# EAGLE board hkr3000 (EAGLE 6.4)
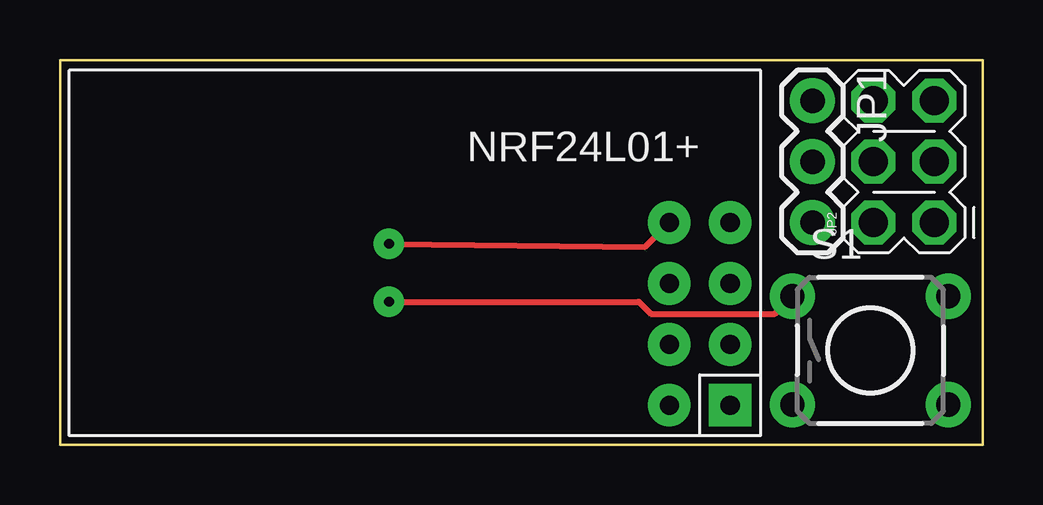
[diagram p0: board, top side]
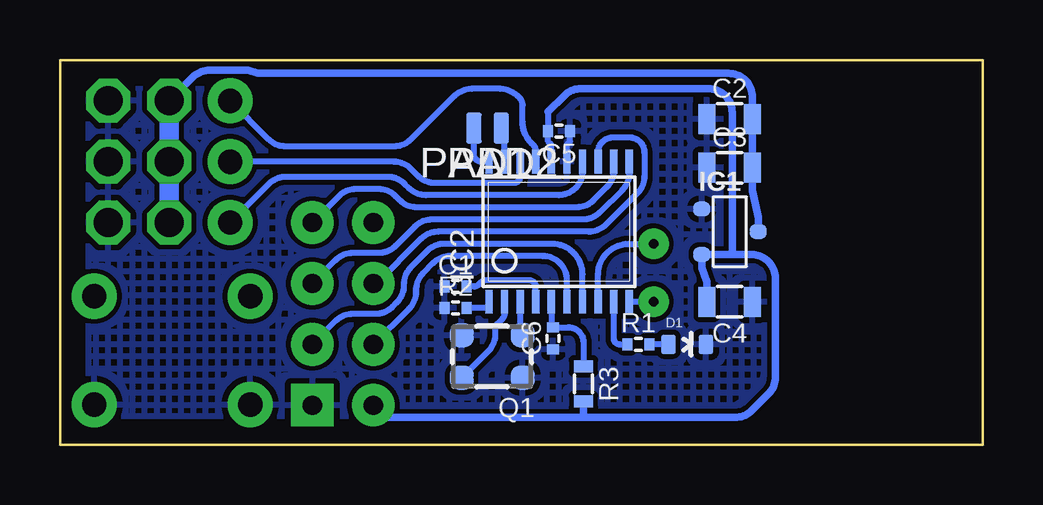
[diagram p1: board, bottom side, seen from below]

Size 38.46 x 16.05 mm. Coordinates in mm from the lower left corner, seen from the top.
Outline: 0,0 38.46,0 38.46,16.05 0,16.05 0,0
Copper layers (1*16): Top 0.035mm / dielectric 1.5mm / Bottom 0.035mm
Design rules "default": minimum track width 10mil, minimum drill 24mil, track to track 8mil, track to pad 8mil, pad to pad 8mil, via to via 8mil, smd to smd 8mil, copper to edge 40mil, drill to drill 8mil, minimum pad ring 10mil, minimum via ring 8mil, stop-mask expansion 4mil, vias tented up to drill 0mil, thermal gap 10mil

## Footprints (pad centres in the part's own frame; a part is rotated, then mirrored left to right if it is on the bottom)
0402 = smd 0.42 x 0.5: P$1 -0.46,0; P$2 0.46,0
0805 = smd 0.7 x 1.25: P$1 -0.95,0; P$2 0.95,0
LED-0603 = smd 0.8 x 0.6: A 0,-0.777; C 0,0.777
XC6206_SOT-23 = smd 0.6 x 0.7: 1 -0.95,-1.161; 2 0.95,-1.161; 3 0,1.186
TSSOP-20 = smd 0.305 x 0.991: 1 -2.925,-2.918; 2 -2.275,-2.918; 3 -1.625,-2.918; 4 -0.975,-2.918; 5 -0.325,-2.918; 6 0.325,-2.918; 7 0.975,-2.918; 8 1.625,-2.918; 9 2.275,-2.918; 10 2.925,-2.918; 11 2.925,2.918; 12 2.275,2.918; 13 1.625,2.918; 14 0.975,2.918; 15 0.325,2.918; 16 -0.325,2.918; 17 -0.975,2.918; 18 -1.625,2.918; 19 -2.275,2.918; 20 -2.925,2.918
1X03 = drill 1.016 pad 1.88: 1 0,0; 2 2.54,0; 3 5.08,0
2X3_POGO = drill 1.2 pad 1.829 octagon: P$1 0,0; P$2 0,2.54; P$3 2.54,0; P$4 2.54,2.54; P$5 5.08,0; P$6 5.08,2.54
SMD1,27-2,54 = smd 1.27 x 0.635: 1 0,0
FA-20H = smd 1 x 1: 1 -1.27,-0.889; 2 1.27,-0.889; 3 1.27,0.889; 4 -1.27,0.889
0603 = smd 0.5 x 0.8: P$1 -0.735,0; P$2 0.735,0
TACTILE-PTH = drill 1.016 pad 1.88: 1 -3.251,2.261; 2 3.251,2.261; 3 -3.251,-2.261; 4 3.251,-2.261
NRF24L01 = drill 0.8 pad 1.778: 3.3V 0,2.54; CE 2.54,0; CSN 2.54,2.54; IRQ 7.62,2.54; MISO 7.62,0; MOSI 5.08,2.54; SCK 5.08,0 | drill 0.8 pad 1.778 square: GND 0,0

## Placement (x,y rotation side)
C1  47n  [0402]  21.97,6.6 0 bottom
C2  4.7u  [0805]  10.54,13.59 0 bottom
C3  4.7u  [0805]  10.54,11.56 0 bottom
C4  4.7u  [0805]  10.54,5.97 180 bottom
C5  0.1u  [0402]  17.65,13.08 180 bottom
C6  0.1u  [0402]  17.91,4.44 90 bottom
D1  RED  [LED-0603]  12.32,4.19 270 bottom
IC1  XC6206-3.3  [XC6206_SOT-23]  10.54,8.89 270 bottom
IC2  STM32F030F4P6  [TSSOP-20]  17.65,8.89 0 bottom
JP1  [1X03]  31.37,14.35 270 top
JP2  [2X3_POGO]  36.45,9.27 90 top
PAD1  [SMD1,27-2,54]  21.21,13.21 90 bottom
PAD2  [SMD1,27-2,54]  20.07,13.21 90 bottom
Q1  16 MHz  [FA-20H]  20.45,3.68 180 bottom
R1  680  [0402]  14.35,4.19 0 bottom
R2  1k  [0402]  21.97,5.71 0 bottom
R3  0r  [0603]  16.64,2.54 270 bottom
S1  Bind  [TACTILE-PTH]  33.78,3.94 0 top
U$1  NRF24L01  [NRF24L01]  27.94,1.65 90 top

## Library data of the parts
C1-C6 R1-R3 = RC.v2
D1 = led; PROD_ID: DIO-00819
IC1 = XC6206
IC2 = stm32f030x
JP1 = SparkFun-Connectors
JP2 = SparkFun-Connectors; PROD_ID: HW-11044
PAD1 PAD2 = pad
Q1 = resonator
S1 = SparkFun-Electromechanical
U$1 = eBay parts

## Nets
3V3: C4.P$2 C5.P$2 IC1.2 IC2.16 R3.P$2 U$1.3.3V
3V3-1: C6.P$2 IC2.5 R3.P$1
GND: C1.P$1 C2.P$1 C3.P$1 C4.P$1 C5.P$1 C6.P$1 D1.C IC1.1 IC2.15 JP2.P$1 JP2.P$3 JP2.P$5 Q1.2 Q1.4 R2.P$1 S1.3 S1.4 U$1.GND
N$1: C2.P$2 C3.P$2 IC1.3 JP2.P$2 JP2.P$4 JP2.P$6
N$2: D1.A R1.P$2
N$3: IC2.20 PAD1.1
N$4: IC2.11 U$1.SCK
N$5: IC2.12 U$1.MISO
N$6: IC2.13 U$1.MOSI
N$7: IC2.17 JP1.1
N$8: IC2.18 JP1.2
N$9: IC2.14 JP1.3
N$10: IC2.2 Q1.3
N$11: IC2.3 Q1.1
N$12: C1.P$2 IC2.4
N$13: IC2.1 R2.P$2
N$14: IC2.9 R1.P$1
N$15: IC2.19 PAD2.1
N$16: IC2.7 U$1.CE
N$17: IC2.6 U$1.CSN
N$18: IC2.8 U$1.IRQ
N$19: IC2.10 S1.1

## Tracks (layer width: path | path; a pad name or v marks a point on that pad's centre or on a via)
3V3
  Bottom 0.254: IC2.16 17.98,12.52 18.11,12.65 C5.P$2 18.11,13.89
  Bottom 0.305: 18.11,13.89 17.44,14.57 arc45 16.73,14.86 11.44,14.86 arc90 10.44,13.86 10.44,7.94 | C4.P$2 11.49,6.79 11.7,7.38 IC1.2 10.44,7.94 | U$1.3.3V 24.89,1.14 16.64,1.14 | 16.64,1.14 10.32,1.14 arc-45 9.61,1.44 8.93,2.12 arc-45 8.64,2.83 8.64,6.94 arc-90 9.64,7.94 10.44,7.94 | R3.P$2 16.64,1.14
3V3-1
  Bottom 0.254: IC2.5 17.98,4.98 C6.P$2 17.27,4.9 arc90 16.64,4.27 R3.P$1
GND
  Bottom 0.254: IC2.15 17.33,12.52 17.19,12.65 C5.P$1
  pour Bottom (hatched): 8.89,15.88 37.97,15.88 37.97,0.13 8.89,0.13
N$1
  Bottom 0.305: IC1.3 9.36,9.48 9.59,10.61 C3.P$2 C2.P$2 9.59,14.49 arc-90 10.59,15.49 30.23,15.49 30.61,15.62 32.22,15.62 arc-45 32.93,15.33 JP2.P$6
  Bottom 0.813: JP2.P$2 JP2.P$4 JP2.P$6
N$2
  Bottom 0.254: D1.A R1.P$2
N$3
  Bottom 0.254: IC2.20 20.89,11.81 arc90 21.21,12.12 PAD1.1
N$4
  Bottom 0.254: IC2.11 14.73,11.34 arc45 15.02,10.63 15.96,9.69 arc45 16.67,9.4 22.95,9.4 arc-45 23.66,9.11 24.47,8.29 arc45 25.18,8 26.26,8 arc-45 26.96,7.71 U$1.SCK
N$5
  Bottom 0.254: IC2.12 15.38,11.45 arc45 15.67,10.75 16.22,10.2 arc45 16.92,9.91 23.59,9.91 arc45 24.3,10.2 24.47,10.38 arc-45 25.18,10.67 26.13,10.67 arc-45 26.84,10.38 U$1.MISO
N$6
  Bottom 0.254: IC2.13 16.03,12.19 arc90 15.39,12.83 14.73,12.83 arc90 14.1,12.19 14.1,11.21 arc45 14.39,10.5 15.71,9.18 arc45 16.42,8.89 22.7,8.89 arc-45 23.41,8.6 25.27,6.73 U$1.MOSI
N$7
  Bottom 0.254: IC2.17 18.63,12.27 arc-45 18.72,12.5 18.8,12.58 arc45 19.18,13.48 19.18,14.16 arc-45 19.31,14.49 arc-45 20.21,14.86 21.19,14.86 arc-45 22.09,14.49 23.84,12.74 arc45 24.54,12.45 29.05,12.45 arc45 29.76,12.74 JP1.1
N$8
  Bottom 0.254: IC2.18 19.28,11.18 arc90 19.53,10.92 22.83,10.92 arc45 23.53,11.21 23.84,11.52 arc-45 24.54,11.81 JP1.2
N$9
  Bottom 0.254: IC2.14 16.68,11.41 arc90 17.68,10.41 23.21,10.41 arc45 23.91,10.71 24.09,10.88 arc-45 24.8,11.18 29.05,11.18 arc-45 29.76,10.88 JP1.3
N$10
  Bottom 0.254: IC2.2 19.93,5.48 arc45 20.02,5.25 20.23,5.05 arc-45 20.32,4.82 20.32,4.6 arc45 20.61,3.9 Q1.3
N$11
  Bottom 0.254: IC2.3 19.28,4.67 Q1.1
N$12
  Bottom 0.254: IC2.4 18.63,6.6 arc-90 18.88,6.86 20.72,6.86 arc-45 20.9,6.78 21.01,6.68 arc45 21.19,6.6 C1.P$2
N$13
  Bottom 0.254: IC2.1 20.58,5.71 R2.P$2
N$14
  Bottom 0.254: IC2.9 15.38,4.44 arc-90 15.12,4.19 R1.P$1
N$15
  Bottom 0.254: IC2.19 19.93,13.07 PAD2.1
N$16
  Bottom 0.254: IC2.7 16.68,7.11 arc-90 17.95,8.38 22.45,8.38 arc-45 23.15,8.09 23.84,7.41 arc-45 24.13,6.7 24.13,6.64 arc45 24.42,5.93 24.6,5.75 arc45 25.31,5.46 26.26,5.46 arc-45 26.96,5.17 U$1.CE
N$17
  Bottom 0.254: IC2.6 17.33,6.87 arc-90 18.33,7.87 22.19,7.87 arc-45 22.9,7.58 23.33,7.15 arc-45 23.62,6.44 23.62,6.38 arc45 23.91,5.68 U$1.CSN
N$18  (via drill 0.41 pad 1.27)
  Top 0.254: v13.72,8.38 24.38,8.26 U$1.IRQ
  Bottom 0.254: IC2.8 16.03,7.11 arc90 14.76,8.38 v13.72,8.38
N$19  (via drill 0.41 pad 1.27)
  Top 0.254: v13.72,5.97 24.13,5.97 24.64,5.46 29.79,5.46 S1.1
  Bottom 0.254: IC2.10 v13.72,5.97